# Altium PCB 5Vto3.3VRegulator.PcbDoc
Units mm, origin at the board's own origin, x right, y up, seen from the top; angles counter-clockwise.
Board outline 23.62 x 6.35 mm, 2 copper layers (Top Layer, Bottom Layer); 5 components, 3 nets, 17 pads, 6 vias.
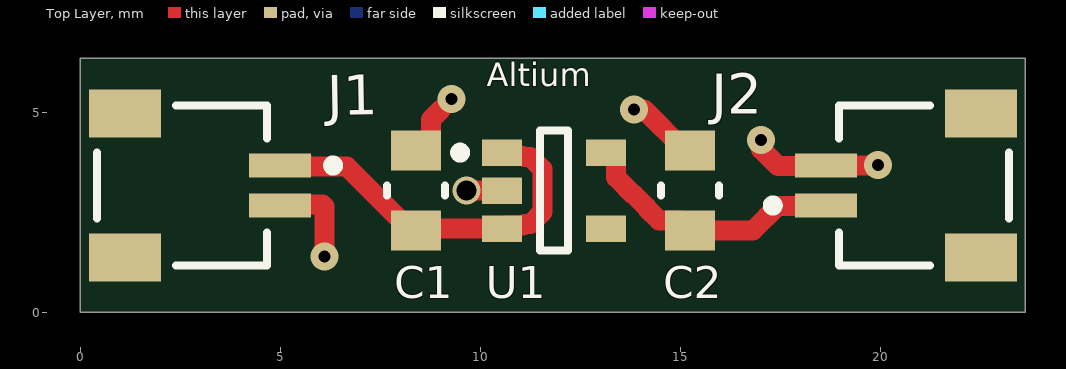
[diagram p0: Top Layer view]
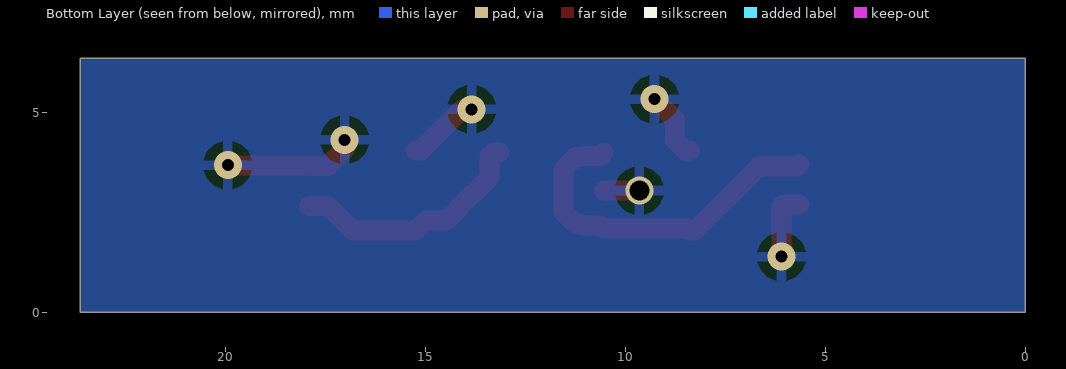
[diagram p1: Bottom Layer view, seen from below]
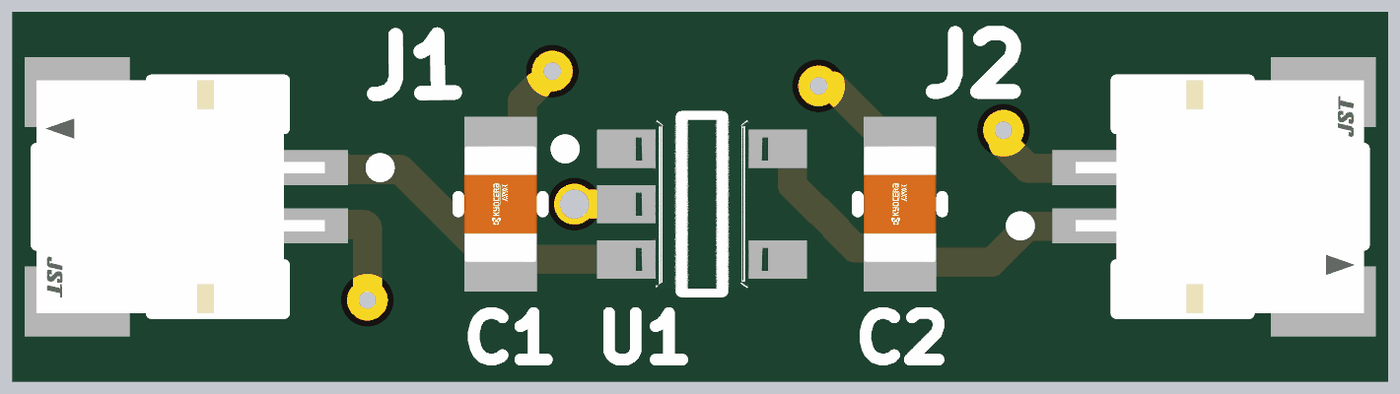
[diagram p2: 3D render of the assembled board from above, using the file's embedded part models]

## Layer stack, top to bottom
Top Solder: solder mask 0.0102, Solder Resist, Dk 3.5
Top Layer: signal copper 0.0356
Dielectric 1: dielectric 0.32, FR-4, Dk 4.8
Bottom Layer: signal copper 0.0356
Bottom Solder: solder mask 0.0102, Solder Resist, Dk 3.5

## Board outline
0,0 0,6.35 23.622,6.35 23.622,0

## Design rules (kind name [scope] priority, off if disabled: settings)
Clearance [All] p1: gap=0.254 ignorepadtopadclearanceinfootprint=FALSE
PolygonConnect [All] p1: connectstyle=Relief reliefconductorwidth=0.254 reliefentries=4 polygonreliefangle="90 Angle" airgapwidth=0.254
RoutingVias [All] p1: holewidth=0.711 width=1.27 viastyle="Through Hole" minholewidth=0.711 minwidth=1.27 maxholewidth=0.711 maxwidth=1.27
SolderMaskExpansion [All] p1: expansion=0.102 istentingtop=FALSE
SupplyNets "Schematic Supply Nets_2" [InNet('+5V')] p1: voltage=0.000
SupplyNets "Schematic Supply Nets_1" [InNet('GND')] p2: voltage=0.000
SupplyNets "Schematic Supply Nets" [InNet('+3.3V')] p3: voltage=0.000
Width [All] p1: maxlimit=0.5 minlimit=0.254 preferedwidth=0.3 minimp=50.000000 maximp=50.000000 favimp=50.000000
30 further rules are at their usual default settings.

## Components (designator, comment, footprint, x,y, rotation, side; value= is the part's Value field where it differs from the comment)
C1 "08051C105K4T2A" FP-0805-L_2_01_0_2-W_1_25-MFG 8.382,3.048 r90 top
C2 "08051C105K4T2A" FP-0805-L_2_01_0_2-W_1_25-MFG 15.24,3.048 r90 top
J1 "SM02B-SRSS-TB (LF)(SN)" FP-SM02B-SRSS-TB_LF_SN-MFG 2.54,3.175 r270 top
J2 "SM02B-SRSS-TB (LF)(SN)" FP-SM02B-SRSS-TB_LF_SN-MFG 21.082,3.175 r90 top
U1 "MIC5317-3.3YM5-TR" FP-SOT23-5LD-PL-1-MFG 11.841,3.048 r0 top

## Footprints (in the part's own frame and the unit in brackets; to place one, negate y for a bottom-side part, rotate by r counter-clockwise, add the part's x,y. Pads: shape width x height; smd on the part's side, far side on the other; paste and mask are expansions set on the pad)
FP-0805-L_2_01_0_2-W_1_25-MFG [mm]
  rect 1x1.25 smd paste+0 mask+0: 1(-1,0) 2(1,0)
  silkscreen extent -0.13,-0.72 0.13,0.72, body extent -1.6,-0.82 1.6,0.82, height 0.25
FP-SM02B-SRSS-TB_LF_SN-MFG [mm]
  rect 0.6x1.55 smd paste+0 mask+0: 1(-0.5,2.45) 2(0.5,2.45)
  rect 1.2x1.8 smd paste+0 mask+0: 3(-1.8,-1.425) 4(1.8,-1.425)
  silkscreen extent -2,-2.12 2,3.9, body extent -2.5,-2.42 2.5,3.32, height 0.25
FP-SOT23-5LD-PL-1-MFG [mm]
  rect 1x0.66 smd paste+0 mask+0: 1(-1.3,0.95) 2(-1.3,0) 3(-1.3,-0.95) 4(1.3,-0.95) 5(1.3,0.95)
  silkscreen extent -2.47,-1.5 0.35,1.5, body extent -1.9,-1.6 1.9,1.6, height 0.25

## Part data
C1 C2: library part CMP-07738-122049624-1, "08051C105K4T2A Cap Ceramic 1uF 100V X7R 10% Pad SMD 0805 125C Automotive T/R", Capacitance=1µF, Case/Package=0805, Dielectric=X7R, Max Operating Temperature=125°C, Min Operating Temperature=-55°C, Tolerance=10%, Voltage Rating=100V, Height=1.4mm, Lifecycle Status=Production, Material=Ceramic, NexarPartId=122049624, RoHS=Compliant, Schedule B=8532240020, Voltage Rating (DC)=100V
J1 J2: library part CMP-17439-000368-1, "CONN HEADER SMD R/A 2POS 1MM", Color=Natural, Contact Resistance=40mR, Current Rating=700mA, Flammability Rating="UL94 V-0", Housing Color=Beige, Insulation Resistance=100MR, Max Current Rating=1A, Max Operating Temperature=85°C, Max Voltage Rating (AC)=50V, Min Operating Temperature=-25°C, Connector Type=Header, Contact Finish - Mating=TIN, Contact Material="Copper Alloy", Contact Plating=Tin, Contact Shape=Square, Contact Type="Male Pin", Depth=4.95mm, Fastening Type=Pull, Housing Material=Polyamide, Insulation Color=Natural, Insulation Material=Nylon, Lead Free="Lead Free", Lead Pitch=1mm, Length=4mm, Material=Polyamide, Mount="Surface Mount", Number of Contacts=2, Number of Positions=2, Number of Rows=1, Orientation="Right Angle", Packaging="Tape and Reel", Pitch=1mm, REACH SVHC="No SVHC", Series=SR, Termination=Solder, Voltage Rating=50V, Voltage Rating (AC)=50V
U1: library part CMP-06324-000116-1, "IC REG LINEAR 3.3V 150MA SOT23-5", Case/Package=SOT-23-5, Dropout Voltage=155mV, Max Input Voltage=6V, Max Operating Temperature=125°C, Min Current Limit=200mA, Min Input Voltage=2.5V, Min Operating Temperature=-40°C, Output Current=150mA, Output Voltage=3.3V, Package Quantity=3000, Power Supply Rejection Ratio (PSRR)=70dB, Mount="Surface Mount", Number of Outputs=1, Number of Regulators=1, Packaging="Tape and Reel", RoHS Compliant=No, Series=-

## Via types
v1: diameter 0.7, hole 0.3, Top Layer to Bottom Layer, 5 vias
v2: diameter 0.7, hole 0.5, Top Layer to Bottom Layer, 1 vias

## Nets (pads, with @x,y where several pads share a name; then routed paths per layer and width w, separated by ;. In a path a pad name is that pad's centre, name@x,y a point inside that pad or via, vN(x,y) a via of type N, cw(c..) or ccw(c..) an arc to the next point about the centre after c; other vN are vias at no path point)
+3.3V: C2.1 J2.1 U1.5 | length 6.2
  Top Layer w0.5: U1.5 13.311,3.998 13.391,3.918 13.391,3.373 13.832,2.932 13.85,2.932 14.145,2.637 14.145,2.619 14.466,2.298 14.99,2.298 C2.1 16.813,2.048 17.432,2.667 J2.1@17.907,2.667
+5V: C1.1 J1.1 U1.1 U1.3 | length 9
  Top Layer w0.5: J1.1@5.653,3.697 5.705,3.645 6.66,3.645 8.257,2.048 C1.1 8.432,2.098 U1.3 10.621,2.178 11.068,2.178 11.104,2.214 11.25,2.214 11.545,2.509 11.545,3.587 11.25,3.882 11.104,3.882 11.068,3.918 10.621,3.918 U1.1
GND: C1.2 C2.2 J1.2 J2.2 U1.2 | length 8.9
  Top Layer w0.5: J1.2@5.653,2.697 6.046,2.697 6.096,2.647 v1@6.096,1.651 ; C1.2 8.507,4.048 8.757,4.298 8.757,4.82 9.017,5.08 ; v2(9.652,3.048) U1.2 ; v1(13.843,5.08) 14.083,5.08 15.115,4.048 C2.2 ; v1(17.018,4.318) 17.018,4.081 17.432,3.667 17.907,3.667 17.915,3.675 19.931,3.675 v1(19.939,3.683)
  other v1: 6.096,1.397 9.271,5.334
pads on no net: J1.3 J1.4 J2.3 J2.4 U1.4

## Polygon pours and split planes (outlines as drawn)
GND on Bottom Layer "NONET_L02_P-001" (solid, pour order 0): 0,6.35 23.622,6.35 23.622,0 0,0

## Silkscreen, mask and mechanical layers (free items; w line width, h text height)
Top Overlay:
  text "Altium" at 10.16,5.461 h1